# Altium PCB zxuno.PcbDoc
Units mil, origin at the board's own origin, x right, y up, seen from the top; angles counter-clockwise.
Board outline 3395.53 x 2214.53 mil, 2 copper layers (Top Layer, Bottom Layer); 91 components, 132 nets, 465 pads, 113 vias.
Unrouted connection lines stored in the file: 2.
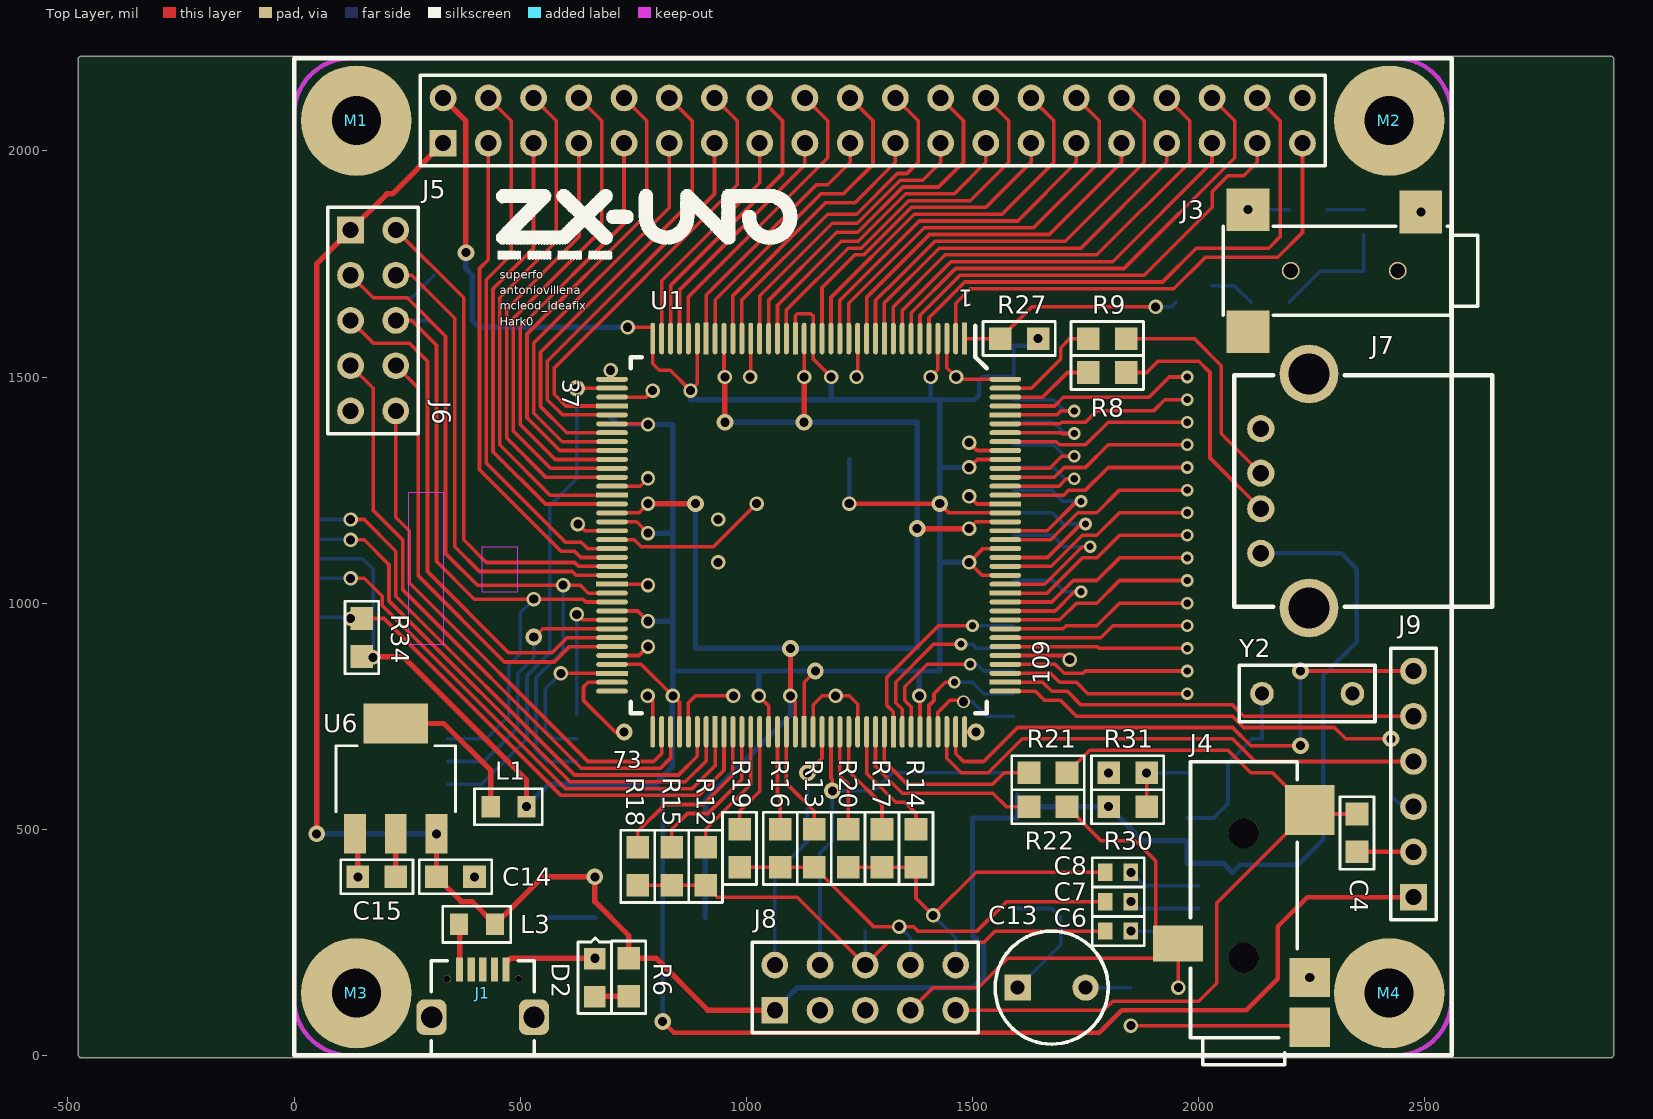
[diagram p0: Top Layer view]
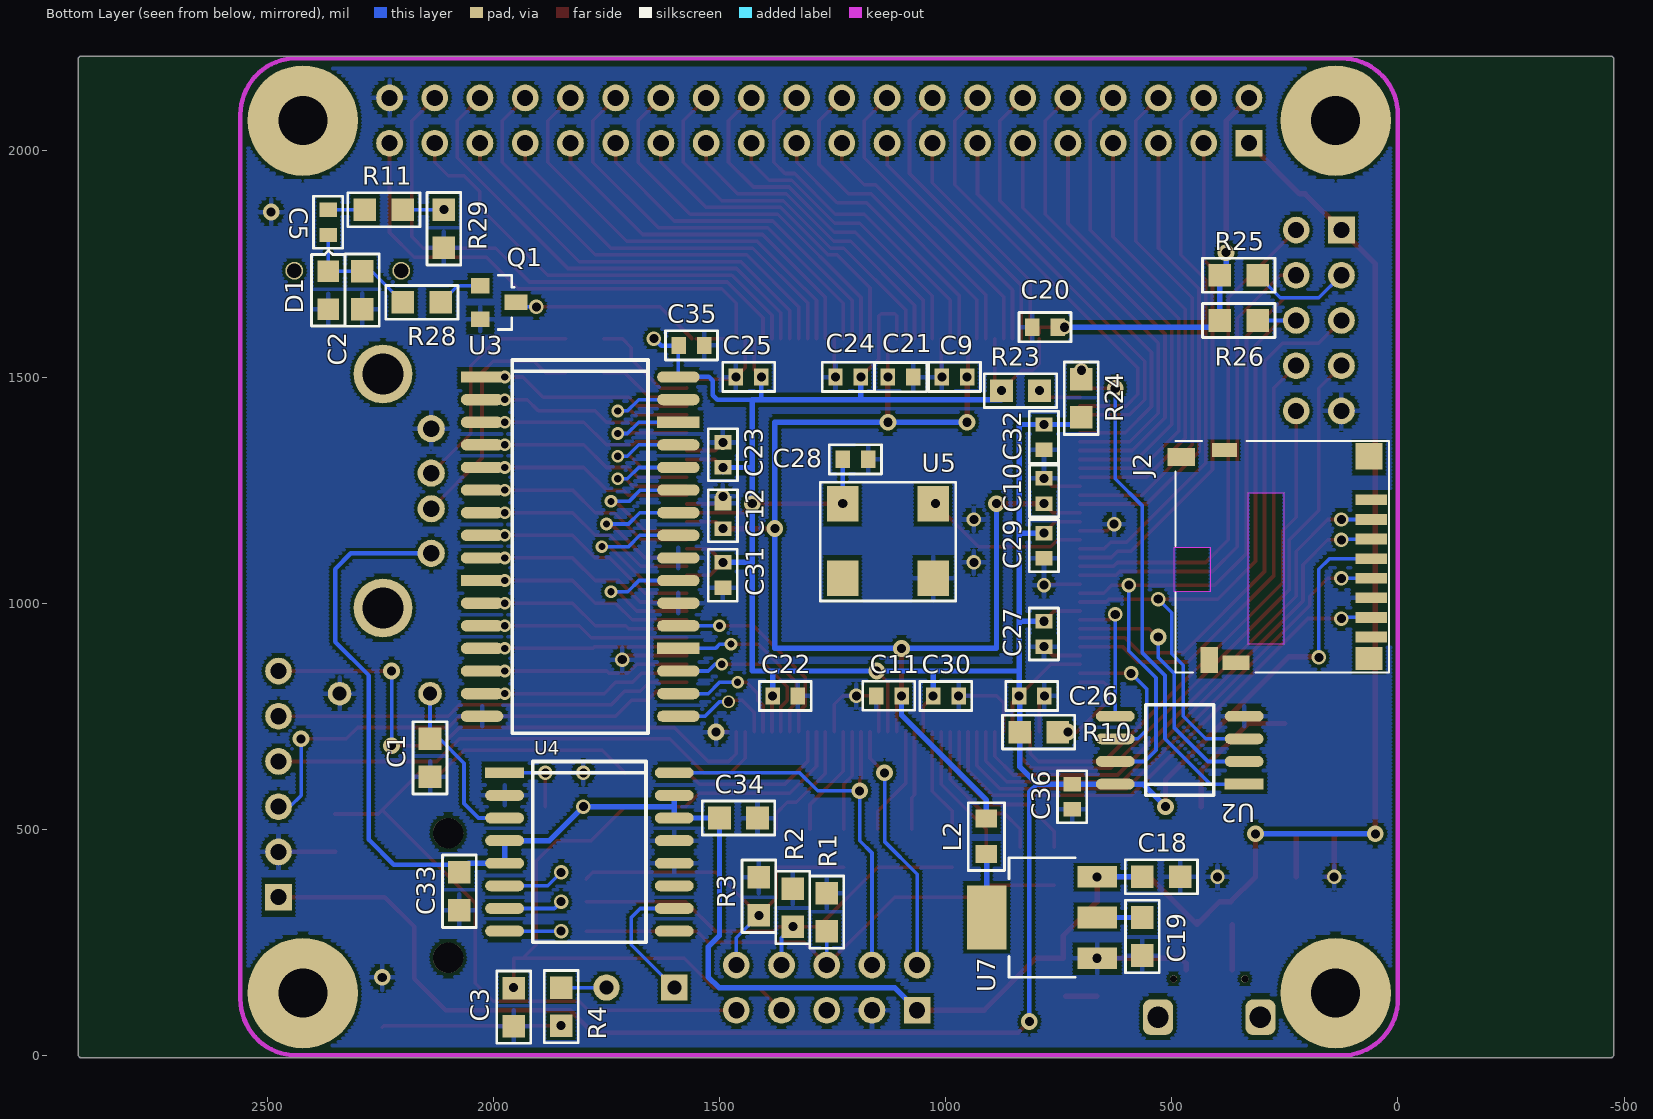
[diagram p1: Bottom Layer view, seen from below]

## Layer stack, top to bottom
Top Solder: solder mask 0.4, Solder Resist, Dk 3.5
Top Layer: signal copper 1.4
Dielectric1: core 12.6, FR-4, Dk 4.8
Bottom Layer: signal copper 1.4
Bottom Solder: solder mask 0.4, Solder Resist, Dk 3.5

## Board outline
-477.44,0 -472.44,-5 2913.09,-5 2918.09,0 2918.09,2204.53 2913.09,2209.53 -472.44,2209.53 -477.44,2204.53

## Design rules (kind name [scope] priority, off if disabled: settings)
Clearance [All] p1: gap=7
HoleSize [All] p1: absolutevalues=TRUE maxlimit=200 minlimit=1 maxpercent=80.000 minpercent=20.000
MinimumSolderMaskSliver [All] p1: minsoldermaskwidth=8
PlaneConnect [All] p1: planeconnectstyle=Relief reliefexpansion=25 reliefentries=4 reliefconductorwidth=12 reliefairgap=10
PolygonConnect [All] p1: connectstyle=Relief reliefconductorwidth=10 reliefentries=4 polygonreliefangle="90 Angle" airgapwidth=10
RoutingLayers RoutingLayers_1 [All] p1: top layer_v5=TRUE bottom layer_v5=TRUE
RoutingLayers [All] p2: top layer_v5=TRUE bottom layer_v5=TRUE
RoutingVias [All] p1: holewidth=20 width=37 viastyle="Through Hole" minholewidth=16 minwidth=28 maxholewidth=28 maxwidth=50
SilkToSilkClearance [All] p1: silktosilkclearance=5
SilkToSolderMaskClearance SilkscreenOverComponentPads [IsPad] p1: minsilkscreentomaskgap=5 clearancetoexposedcopper=TRUE
SolderMaskExpansion [All] p1: expansion=0
UnpouredPolygon [All] p1: allowunpoured=FALSE
Width Net_Width_1 [InNet('1.2V') Or InNet('2.5V') Or InNet('3.3V') Or InNet('5V')] p1: maxlimit=12 minlimit=8 preferedwidth=10
Width [All] p2: maxlimit=12 minlimit=8 preferedwidth=10
23 further rules are at their usual default settings.

## Components (designator, comment, footprint, x,y, rotation, side; value= is the part's Value field where it differs from the comment)
C1 "10pF" SM/C_0805#1 2140,700 r270 bottom
C2 "10nF" SM/C_0805#2 2290,1650 r270 bottom
C3 "10nF" SM/C_0805#2 1955,65 r270 bottom
C4 "10nF" SM/C_0805#2 2350,450 r270 top
C5 "100nF" SM/C_0603 2365,1870 r270 bottom
C6 "100nF" SM/C_0603 1794,275 r0 top
C7 "100nF" SM/C_0603 1794,340 r0 top
C8 "100nF" SM/C_0603 1794,405 r0 top
C9 "100nF" SM/C_0603 952.56,1500 r0 bottom
C10 "100nF" SM/C_0603 782.56,1220 r90 bottom
C11 "100nF" SM/C_0603 1097.56,795 r0 bottom
C12 "100nF" SM/C_0603 1492.56,1165 r90 bottom
C13 "220uF" CYL/D.250/LS.150/.031 1600,150 r0 top
C14 "4.7uF" SM/C_0805#1 315,395 r0 top
C15 "4.7uF" SM/C_0805#1 225,395 r180 top
C18 "4.7uF" SM/C_0805#2 565,395 r0 bottom
C19 "4.7uF" SM/C_0805#2 565,305 r90 bottom
C20 "100nF" SM/C_0603 752.56,1610 r0 bottom
C21 "100nF" SM/C_0603 1127.56,1500 r180 bottom
C22 "100nF" SM/C_0603 1382.56,795 r180 bottom
C23 "100nF" SM/C_0603 1492.56,1300 r90 bottom
C24 "100nF" SM/C_0603 1187.56,1500 r0 bottom
C25 "100nF" SM/C_0603 1407.56,1500 r0 bottom
C26 "100nF" SM/C_0603 837.56,795 r180 bottom
C27 "100nF" SM/C_0603 782.56,960 r270 bottom
C28 "100nF" SM/C_0603 1227.56,1318 r180 bottom
C29 "100nF" SM/C_0603 782.56,1155 r270 bottom
C30 "100nF" SM/C_0603 1027.56,795 r180 bottom
C31 "100nF" SM/C_0603 1492.56,1090 r270 bottom
C32 "100nF" SM/C_0603 782.56,1395 r270 bottom
C33 "10uF" SM/C_0805#1 2075,405 r270 bottom
C34 "10uF" SM/C_0805#1 1500,525 r180 bottom
C35 "100nF" SM/C_0603 1590,1570 r180 bottom
C36 "100nF" SM/C_0603 720,600 r270 bottom
D1 "1N4148" SM/D_0805_21 2365,1650 r270 bottom
D2 "LED" SM/D_0805_21 665,130 r270 top
J1 "microUSB" "MICRO USB" 417.32,190 r0 top
J2 "MicroSD" "SD HR1941CT-ND" 59.06,1102.36 r90 bottom
J3 "Phonejack2 TN" "AUDIO  JACK MJ-2523-SMT" 2440,1735 r180 top
J4 "Phonejack4" "AUDIO  JACK SJ-43514-SMT" 2100,216 r90 top locked
J5 "Header 20X2" HDR2X20 329.53,2016.93 r0 top locked (schematic designator P1)
J6 "Header 5X2" HDR2X5 125,1825 r270 top
J7 "USB" "USB A" 2244.09,1248.03 r90 top locked
J8 "Header 5X2" HDR2X5 1062.86,100 r0 top locked
J9 "Header 6" HDR1X6 2475,350 r90 top
L1 "Inductor" SM/L_0805 435,550 r0 top
L2 "Inductor" SM/L_0805 910,445 r90 bottom
L3 "Inductor" SM/L_0805 365,290 r0 top
M1 "M2.5" M2.5#1 -722.44,2050 r0 top
M2 "M2.5" M2.5#2 3177.56,2070 r0 top
M3 "M2.5" M2.5#3 -792.44,-110 r0 top
M4 "M2.5" M2.5#4 3092.56,-175 r0 top
Q1 "BC846" SM/SOT23_231 1950,1665 r90 bottom
R1 "75" SM/R_0805#1 1262.86,275 r270 bottom
R2 "75" SM/R_0805#1 1337.86,285 r270 bottom
R3 "75" SM/R_0805#2 1412.86,310 r90 bottom
R4 "75" SM/R_0805#1 1850,150 r90 bottom
R6 "300" SM/R_0805#2 740,215 r270 top
R8 "270" SM/R_0805#2 1840,1510 r180 top
R9 "270" SM/R_0805#2 1840,1585 r180 top
R10 "300" SM/R_0805#2 752.56,715 r0 bottom
R11 "470" SM/R_0805#1 2200,1870 r180 bottom
R12 "470" SM/R_0805#2 910,460 r270 top
R13 "470" SM/R_0805#2 1150,500 r270 top
R14 "470" SM/R_0805#2 1375,500 r270 top
R15 "1K" SM/R_0805#2 835,460 r270 top
R16 "1K" SM/R_0805#2 1075,500 r270 top
R17 "1K" SM/R_0805#2 1300,500 r270 top
R18 "2K" SM/R_0805#2 760,460 r270 top
R19 "2K" SM/R_0805#2 985,500 r270 top
R20 "2K" SM/R_0805#2 1225,500 r270 top
R21 "3K9" SM/R_0805#2 1625,625 r0 top
R22 "3K9" SM/R_0805#2 1625,550 r0 top
R23 "4K7" SM/R_0805#2 792.56,1470 r0 bottom
R24 "4K7" SM/R_0805#2 700,1495 r270 bottom
R25 "2K" SM/R_0805#2 310,1725 r0 bottom
R26 "2K" SM/R_0805#2 310,1625 r0 bottom
R27 "10K" SM/R_0805#2 1645,1585 r180 top
R28 "10K" SM/R_0805#1 2200,1665 r0 bottom
R29 "10K" SM/R_0805#1 2109.28,1869.85 r90 bottom
R30 "0" SM/R_0805#2 1885,550 r180 top (schematic designator R32)
R31 "0" SM/R_0805#2 1885,625 r180 top (schematic designator R33)
R34 "10K" SM/R_0805#2 150,966 r270 top
U1 "XC6SLX9/TFP144_1" QUAD.50M/144/WG22.60 1482.56,1585 r180 top locked
U2 "W25X40BV/W25Q80BV" SOJ.050/8/WB.300/L.200 340,600 r270 bottom
U3 "CY62148EV30" SOG.050/32/WG.480/L.825 2025,1500 r270 bottom locked
U4 "AD724" SOJ.050/16/WB.400/L.400 1975,625 r270 bottom
U5 "50MHz" SM/OSC 1227.56,1055 r0 bottom
U6 "ZLDO1117G33TA" SM/SOT223 135,490 r0 top
U7 "ZLDO1117G12TA" SM/SOT223 665,215 r90 bottom
Y2 "4.43M" RAD/.300X.125/LS.200/.031 2140,800 r0 top

## Footprints (in the part's own frame and the unit in brackets; to place one, negate y for a bottom-side part, rotate by r counter-clockwise, add the part's x,y. Pads: shape width x height; smd on the part's side, far side on the other; paste and mask are expansions set on the pad)
"AUDIO  JACK MJ-2523-SMT" [mil]
  rect 94.47x94.47 smd: 1(-51.18,-129.72) 2(330.72,-134.85) 3(330.72,134.85)
  round 39.37 hole 31.5 unplated: 4(0,0) 5(236.2,0)
  silkscreen extent -177,-98 385,98
"AUDIO  JACK SJ-43514-SMT" [mm]
  rect 2.2x2.286 smd: 1(-3.9,-3.7) 4(-1.1,-3.7)
  rect 2.8x2.8 smd: 2(8.3,-3.7)
  rect 2x2.8 smd: 3(0.8,3.7)
  round 1.7 hole 1.7 unplated: M(0,0) M(7,0)
  silkscreen extent -6,-3 11,3
CYL/D.250/LS.150/.031 [mil]
  rect 58x58 / inner round 60 / far side rect 58x58 hole 31: 1(0,0)
  round 58 / inner round 60 / far side round 58 hole 31: 2(150,0)
  silkscreen extent -50,-125 200,125
HDR1X6 [mm] "Connector; Header; 6 Position"
  rect 1.5x1.5 hole 0.9: 1(0,0)
  round 1.5 hole 0.9: 2(2.54,0) 3(5.08,0) 4(7.62,0) 5(10.16,0) 6(12.7,0)
  silkscreen extent -1.27,-1.27 13.97,1.27
HDR2X5 [mm] "Connector; Header; 5x2 Position"
  rect 1.5x1.5 hole 0.9: 1(0,0)
  round 1.5 hole 0.9: 2(0,2.54) 3(2.54,0) 4(2.54,2.54) 5(5.08,0) 6(5.08,2.54) 7(7.62,0) 8(7.62,2.54) 9(10.16,0) 10(10.16,2.54)
  silkscreen extent -1.27,-1.27 11.43,3.81
HDR2X20 [mm] "Connector; Header; 20x2 Position"
  rect 1.5x1.5 hole 0.9: 1(0,0)
  round 1.5 hole 0.9: 2(0,2.54) 3(2.54,0) 4(2.54,2.54) 5(5.08,0) 6(5.08,2.54) 7(7.62,0) 8(7.62,2.54) 9(10.16,0) 10(10.16,2.54) 11(12.7,0) 12(12.7,2.54) 13(15.24,0) 14(15.24,2.54) 15(17.78,0) 16(17.78,2.54) 17(20.32,0) 18(20.32,2.54) 19(22.86,0) 20(22.86,2.54) 21(25.4,0) 22(25.4,2.54) 23(27.94,0) 24(27.94,2.54) 25(30.48,0) 26(30.48,2.54) 27(33.02,0) 28(33.02,2.54) 29(35.56,0) 30(35.56,2.54) 31(38.1,0) 32(38.1,2.54) 33(40.64,0) 34(40.64,2.54) 35(43.18,0) 36(43.18,2.54) 37(45.72,0) 38(45.72,2.54) 39(48.26,0) 40(48.26,2.54)
  silkscreen extent -1.27,-1.27 49.53,3.81
M2.5#1 [mm]
  round 6.2 hole 2.75: ""(21.85,0.43)
M2.5#2 [mm]
  round 6.2 hole 2.75: ""(-19.21,-0.078)
M2.5#3 [mm]
  round 6.2 hole 2.75: ""(23.628,6.294)
M2.5#4 [mm]
  round 6.2 hole 2.75: ""(-17.051,7.945)
"MICRO USB" [mm]
  rect 0.4x1.35 smd: 1(-1.3,0) 2(-0.65,0) 3(0,0) 4(0.65,0) 5(1.3,0)
  round 0.4 hole 0.4 unplated: 11(2,-0.525) M(-2,-0.525)
  rrect50% 1.7x2 hole 1.2: M(-2.875,-2.675) M(2.875,-2.675)
  silkscreen extent -2.9,-4.8 2.9,0.5
QUAD.50M/144/WG22.60 [mil]
  rect 11x70 smd: 1(0,0) 10(177.3,0) 20(374.3,0) 30(571.3,0) 80(551.6,869.5) 90(354.6,869.5) 100(157.6,869.5)
  oval 11x70 smd: 2(19.7,0) 3(39.4,0) 4(59.1,0) 5(78.8,0) 6(98.5,0) 7(118.2,0) 8(137.9,0) 9(157.6,0) 11(197,0) 12(216.7,0) 13(236.4,0) 14(256.1,0) 15(275.8,0) 16(295.5,0) 17(315.2,0) 18(334.9,0) 19(354.6,0) 21(394,0) 22(413.7,0) 23(433.4,0) 24(453.1,0) 25(472.8,0) 26(492.5,0) 27(512.2,0) 28(531.9,0) 29(551.6,0) 31(591,0) 32(610.7,0) 33(630.4,0) 34(650.1,0) 35(669.8,0) 36(689.5,0) 73(689.5,869.5) 74(669.8,869.5) 75(650.1,869.5) 76(630.4,869.5) 77(610.7,869.5) 78(591,869.5) 79(571.3,869.5) 81(531.9,869.5) 82(512.2,869.5) 83(492.5,869.5) 84(472.8,869.5) 85(453.1,869.5) 86(433.4,869.5) 87(413.7,869.5) 88(394,869.5) 89(374.3,869.5) 91(334.9,869.5) 92(315.2,869.5) 93(295.5,869.5) 94(275.8,869.5) 95(256.1,869.5) 96(236.4,869.5) 97(216.7,869.5) 98(197,869.5) 99(177.3,869.5) 101(137.9,869.5) 102(118.2,869.5) 103(98.5,869.5) 104(78.8,869.5) 105(59.1,869.5) 106(39.4,869.5) 107(19.7,869.5) 108(0,869.5)
  oval 70x11 smd: 37(779.5,90) 38(779.5,109.7) 39(779.5,129.4) 41(779.5,168.8) 42(779.5,188.5) 43(779.5,208.2) 44(779.5,227.9) 45(779.5,247.6) 46(779.5,267.3) 47(779.5,287) 48(779.5,306.7) 49(779.5,326.4) 51(779.5,365.8) 52(779.5,385.5) 53(779.5,405.2) 54(779.5,424.9) 55(779.5,444.6) 56(779.5,464.3) 57(779.5,484) 58(779.5,503.7) 59(779.5,523.4) 61(779.5,562.8) 62(779.5,582.5) 63(779.5,602.2) 64(779.5,621.9) 65(779.5,641.6) 66(779.5,661.3) 67(779.5,681) 68(779.5,700.7) 69(779.5,720.4) 71(779.5,759.8) 72(779.5,779.5) 109(-90,779.5) 111(-90,740.1) 112(-90,720.4) 113(-90,700.7) 114(-90,681) 115(-90,661.3) 116(-90,641.6) 117(-90,621.9) 118(-90,602.2) 119(-90,582.5) 121(-90,543.1) 122(-90,523.4) 123(-90,503.7) 124(-90,484) 125(-90,464.3) 126(-90,444.6) 127(-90,424.9) 128(-90,405.2) 129(-90,385.5) 131(-90,346.1) 132(-90,326.4) 133(-90,306.7) 134(-90,287) 135(-90,267.3) 136(-90,247.6) 137(-90,227.9) 138(-90,208.2) 139(-90,188.5) 141(-90,149.1) 142(-90,129.4) 143(-90,109.7) 144(-90,90)
  rect 70x11 smd: 40(779.5,149.1) 50(779.5,346.1) 60(779.5,543.1) 70(779.5,740.1) 110(-90,759.8) 120(-90,562.8) 130(-90,365.8) 140(-90,168.8)
  silkscreen extent -49,-28 738,829
RAD/.300X.125/LS.200/.031 [mil]
  round 52 hole 31: 1(0,0) 2(200,0)
  silkscreen extent -50,-62 250,62
"SD HR1941CT-ND" [mm] "Connector; Header; 8 Position"
  rect 0.6x1.75 smd: 1(3.2,0) 2(2.1,0) 3(1,0) 4(-0.1,0) 5(-1.2,0) 6(-2.3,0) 7(-3.4,0) 8(-4.5,0)
  rect 1x1.55 smd: 9(5.6,10.675)
  rect 1.45x1 smd: 10(-5.8,9.1)
  rect 1.3x1.5 smd: P1(-5.7,0.125)
  rect 1.5x1.5 smd: P2(5.65,0.125)
  rect 0.8x1.5 smd: P3(-5.95,7.6)
  rect 0.8x1.4 smd: P4(6,8.25)
  Keep-Out Layer pour cut-out: -4.9,6.9 3.6,6.9 3.6,4.9 -4.9,4.9
  Keep-Out Layer pour cut-out: -1.95,11.05 0.55,11.05 0.55,9.05 -1.95,9.05
  silkscreen extent -6.5,-1 6.5,11
SM/C_0603 [mil]
  rect 32x38 smd: 1(0,0) 2(56,0)
  silkscreen extent -30,-33 86,32
SM/C_0805#1 [mil]
  rect 50x50 smd: 1(0,0) 2(84,0)
  silkscreen extent -38,-38 122,38
SM/C_0805#2 [mil]
  rect 50x50 smd: 1(0,0) 2(-84,0)
  silkscreen extent -122,-38 38,38
SM/D_0805_21 [mil]
  rect 48x48 smd: 1(0,0) 2(-84,0)
  silkscreen extent -130,-37 37,37
SM/L_0805 [mil]
  rect 40x48 smd: 1(0,0) 2(79,0)
  silkscreen extent -36,-40 114,40
SM/OSC [mil]
  rect 70x78 smd: 1(0,0) 2(-200,0) 3(-200,-165) 4(0,-165)
  silkscreen extent -250,-212 50,50
SM/R_0805#1 [mil]
  rect 50x50 smd: 1(0,0) 2(-84,0)
  silkscreen extent -122,-38 38,38
SM/R_0805#2 [mil]
  rect 50x50 smd: 1(0,0) 2(84,0)
  silkscreen extent -38,-38 122,38
SM/SOT23_231 [mil]
  rect 34x50 smd: 1(0,0)
  rect 34x40 smd: 2(37,79) 3(-37,79)
  silkscreen extent -60,3 60,39
SM/SOT223 [mil]
  rect 48x88 smd: 1(0,0) 2(90,0) 3(180,0)
  rect 142x88 smd: 4(90,244)
  silkscreen extent -42,49 222,195
SOG.050/32/WG.480/L.825 [mil]
  rect 25x94 smd: 1(0,0) 10(450,0) 20(600,434) 30(100,434)
  oval 25x94 smd: 2(50,0) 3(100,0) 4(150,0) 5(200,0) 6(250,0) 7(300,0) 8(350,0) 9(400,0) 11(500,0) 12(550,0) 13(600,0) 14(650,0) 15(700,0) 16(750,0) 17(750,434) 18(700,434) 19(650,434) 21(550,434) 22(500,434) 23(450,434) 24(400,434) 25(350,434) 26(300,434) 27(250,434) 28(200,434) 29(150,434) 31(50,434) 32(0,434)
  silkscreen extent -37,67 788,367
SOJ.050/8/WB.300/L.200 [mil]
  rect 24x86 smd: 1(0,0)
  oval 24x86 smd: 2(-50,0) 3(-100,0) 4(-150,0) 5(-150,-285) 6(-100,-285) 7(-50,-285) 8(0,-285)
  silkscreen extent -175,-218 25,-67
SOJ.050/16/WB.400/L.400 [mil]
  rect 24x86 smd: 1(0,0)
  oval 24x86 smd: 2(50,0) 3(100,0) 4(150,0) 5(200,0) 6(250,0) 7(300,0) 8(350,0) 9(350,375) 10(300,375) 11(250,375) 12(200,375) 13(150,375) 14(100,375) 15(50,375) 16(0,375)
  silkscreen extent -25,62 375,312
"USB A" [mm]
  round 1.524 hole 0.92: 1(-3.5,2.71) 2(-1,2.71) 3(1,2.71) 4(3.5,2.71)
  round 3.3 hole 2.3: 5(-6.57,0) 6(6.57,0)
  silkscreen extent -6.5,-10.3 6.5,4.2

## Part data
C1 C2 C3 C4 C5 C6 C7 C8: library part "CAP NP_Dup1"
C9 C10 C11 C12 C14 C15 C18 C19 C20 C21 C22 C23 C24 C25 C26 C27 C28 C29 C30 C31 C32 C33 C34 C35 C36: library part "CAP NP"
C13: library part CAP
D1: library part DIODE
J1: library part CON2_0
J2: library part "Header 8", "Header, 8-Pin"
J3: "Jack Socket, 3.5mm, Thru-Hole, Vertical, 2-Conductor with Tip closed"
J4: "Jack Socket, 3.5mm, Thru-Hole, Right Angle, 4-Conductor"
J5: "Header, 20-Pin, Dual row"
J6 J8: "Header, 5-Pin, Dual row"
J7: library part "Header 4", "Header, 4-Pin"
J9: "Header, 6-Pin"
Q1: library part BC547
R1 R2 R3 R4 R6 R8 R9 R10 R11 R12 R13 R14 R15 R16 R17 R18 R19 R20 R21 R22 R23 R24 R25 R26 R27 R28 R29 R30 R31 R34: library part R
U2: library part AT45DB011/SOIC_3
U3: library part CY62128/SOIC_3
U5: library part CS-403/TO_0
U6 U7: library part REGULATOR-1_0
Y2: library part CRYSTAL

## Via types
v1: diameter 32, hole 20, Top Layer to Bottom Layer, 59 vias
v2: diameter 28, hole 16, Top Layer to Bottom Layer, 27 vias
v3: diameter 37, hole 20, Top Layer to Bottom Layer, 26 vias
v4: diameter 28, hole 20, Top Layer to Bottom Layer, 1 vias

## Nets (pads, with @x,y where several pads share a name; then routed paths per layer and width w, separated by ;. In a path a pad name is that pad's centre, name@x,y a point inside that pad or via, vN(x,y) a via of type N, cw(c..) or ccw(c..) an arc to the next point about the centre after c; other vN are vias at no path point)
1.2V: C9.1 C10.1 C11.1 C12.1 C21.1 L2.2 U1.19 U1.28 U1.52 U1.89 U1.128 | length 3034.4
  Top Layer w8: U1.52 762.06,1199.5 v1(782.56,1220) ; v1@950.66,1501.9 U1.28 ; v1(1097.56,795) 1108.26,784.3 U1.89 ; v1@1127.96,1500.4 U1.19 ; v1(1492.56,1165) 1507.36,1179.8 U1.128
  Top Layer w12: v1(782.56,1220) v3(887.56,1220) ; v3(952.56,1400) v1(952.56,1500) ; v1(1097.56,795) v3(1097.56,900) ; v3(1127.56,1400) v1(1127.56,1500) ; v3(1377.56,1165) v1(1492.56,1165)
  Bottom Layer w12: v3(887.56,1220) 887.56,900 v3(1097.56,900) 1377.56,900 v3(1377.56,1165) 1377.56,1400 v3(1127.56,1400) v3(952.56,1400) ; L2.2 910,564.88 1097.56,752.44 v1(1097.56,795)
3.3V: C20.1 C22.1 C23.1 C24.1 C25.1 C26.1 C27.1 C28.1 C29.1 C30.1 C31.1 C32.1 C35.1 C36.1 J2.4 J5.2 J9.1 L1.2 R10.2 R23.2 R24.2 R25.2 R26.2 R27.1 R34.2 U1.4 U1.18 U1.20 U1.31 U1.36 U1.42 U1.53 U1.63 U1.69 U1.76 U1.86 U1.90 U1.103 U1.122 U1.125 U1.129 U1.135 U2.8 U3.32 U5.4 | length 10137.4
  Top Layer w8: U1.69 767.96,864.6 v1(837.56,795) 852.16,780.4 U1.76 ; U1.63 759.76,982.8 v1(782.56,960) ; U1.53 757.76,1179.8 v1(782.56,1155) ; U1.42 v1@781.06,1396.5 ; v1(737.56,1610) 790,1610 793.06,1606.94 U1.36@793.06,1596.94 ; U1.36 793.06,1529.5 807.56,1515 831.56,1515 v1(876.56,1470) 891.56,1485 U1.31 ; v1(1027.56,795) 1049.16,773.4 U1.86 ; U1.20 1108.26,1635.7 1112.56,1640 1142.56,1640 1147.66,1634.9 U1.18 1147.66,1539.9 v1(1187.56,1500) ; U1.90 1127.96,825.4 v3(1152.56,850) ; v1(1382.56,795) 1384.06,793.5 U1.103 ; v1(1407.56,1500) 1423.46,1515.9 U1.4 ; v3(1427.56,1220) 1448.06,1199.5 U1.129 ; v1(1492.56,1300) 1510.26,1317.7 U1.135 ; U1.122 1520.96,1061.6 v1(1492.56,1090) 1523.26,1120.7 U1.125
  Top Layer w10: v3(815,75) 840,50 1780,50 1830,100 2105,100 2175,170 2175,285 2240,350 J9.1 ; v1(1227.56,1220) v3(1427.56,1220)
  Top Layer w12: v1@175,882 241,882 514,609 v3(514,550) ; J5.2 380,2066.46 v3(380,1775)
  Bottom Layer w8: J2.4 151.57,1098.43 175,1075 v1(175,880) ; U3.32@1590,1501 U3.32 C35.1@1591,1569
  Bottom Layer w10: 798,600 815,583 v3(815,75) ; v1(1227.56,1220) C28.1 ; 1407.56,1450 v1(1407.56,1500) ; 1427.56,1450 1505,1450 1515,1460 1515,1492 1524,1501 U3.32@1590,1501 ; C35.1@1591,1569 1629,1569 v1(1645,1585)
  Bottom Layer w12: v3(380,1775) 380,1739 R25.2 R26.2 409,1610 v1(737.56,1610) C20.1 ; v3(514,550) 564,600 U2.8 C36.1 798,600 836.56,638.56 R10.2 C26.1@836.56,794 ; R24.2 716,1395 v1(782.56,1395) 837.56,1395 837.56,1155 ; v1(782.56,960) 837.56,960 ; v1(782.56,1155) 837.56,1155 ; v1(837.56,795) 837.56,850 ; R23.2@877.56,1450 1407.56,1450 1427.56,1450 1427.56,1300 ; v1(1027.56,795) 1027.56,850 ; 1187.56,1451 v1(1187.56,1500) ; v1(1382.56,795) 1382.56,850 ; v1(1492.56,1090) 1427.56,1090 ; C23.1@1497.56,1300 1497.56,1295 1492.56,1290 1482.56,1300 1427.56,1300 ; 837.56,850 837.56,960 ; 837.56,850 1027.56,850 ; 837.56,960 837.56,1155 ; 1027.56,850 v3(1152.56,850) 1382.56,850 ; 1382.56,850 1427.56,850 1427.56,1090 ; 1427.56,1090 v3(1427.56,1220) 1427.56,1300
5V: C14.1 C18.1 C33.1 C34.1 J5.1 J6.1 J7.1 J8.1 L3.2 R6.1 R30.2 U4.4 U4.5 U4.14 U4.15 U6.3 U7.3 | length 5788.9
  Top Layer w12: v3(50,490) 50,1750 J6.1 205,1905 217.6,1905 J5.1 ; v3(315,490) C14.1 370,340 394,340 L3.2 ; L3.2@444,296 L3.2 ; J8.1 915,100 800,215 R6.1 740,265 665,340 v3(665,395) 549,395 L3.2
  Bottom Layer w10: C33.1 2092,422 2220,422 2275,477 2275,840 2350,915 2350,1075 2315,1110 J7.1@2137.64,1110
  Bottom Layer w12: v3(50,490) v3(315,490) ; C18.1 v3(665,395) ; J8.1 1112.86,150 1501,150 1525,174 1525,240 1500,265 C34.1 U4.14 1600,550 ; U4.15 1600,550 ; C33.1 2055,425 U4.5 U4.4 1876,475 v1(1801,550) 1600,550
B: C6.1 J8.6 R1.1 R12.2 R15.2 R18.2 | length 1213
  Top Layer w8: R18.2 R15.2 R12.2 936,350 1112.86,350 J8.6 1312.86,250 1525,250 1550,275 C6.1
  Bottom Layer w8: J8.6 R1.1
B0: R18.1 U1.82 | length 392.4
  Top Layer w8: R18.1 760,495 820,555 905,555 970.36,620.36 U1.82
B1: R15.1 U1.83 | length 346.1
  Top Layer w8: R15.1 835,500 870,535 915,535 990.06,610.06 U1.83
B2: R12.1 U1.84 | length 296.8
  Top Layer w8: R12.1 910,500 1009.76,599.76 U1.84
CLK: U1.55 U5.3 | length 365.2
  Top Layer w8: U1.55 752.16,1140.4 767.56,1125 927.56,1125 v1(1022.56,1220)
CSYNC: J8.4 U1.93 U4.16 | length 959.5
  Top Layer w8: U1.93 1187.06,612.94 1190,610 v3(1190,585) v3@1190,580
  Bottom Layer w8: J8.4 1162.86,447.86 1190,475 v3(1190,585) 1283,585 1323,625 U4.16
EAR: Q1.1 R27.2 U1.1 | length 490.6
  Top Layer w8: U1.1 R27.2@1551,1585 ; R27.2 1631,1655 v1(1905,1655)
  Bottom Layer w8: v1(1905,1655) 1940,1655 Q1.1
EXT1: J5.3 U1.57 | length 1103.4
  Top Layer w8: J5.3 429.53,1759.53 410,1740 410,1295 590,1115 620,1115 634,1101 U1.57
EXT2: J5.4 U1.56 | length 1207.1
  Top Layer w8: J5.4 480,2066.46 480,1770 425,1715 425,1310 600,1135 635,1135 649.3,1120.7 U1.56
EXT3: J5.5 U1.51 | length 1030
  Top Layer w8: J5.5 529.53,1784.53 440,1695 440,1335 555.8,1219.2 U1.51
EXT4: J5.6 U1.50 | length 1133.7
  Top Layer w8: J5.6 580,2066.46 580,1800 455,1675 455,1350 566.1,1238.9 U1.50
EXT5: J5.7 U1.48 | length 986.5
  Top Layer w8: J5.7@630,2016.46 630,1810 470,1650 470,1365 557,1278 U1.48@702.76,1278
EXT6: J5.8 U1.47 | length 1090.6
  Top Layer w8: J5.8 680,2066.46 680,1825 485,1630 485,1380 567,1298 U1.47
EXT7: J5.9 U1.46 | length 952.1
  Top Layer w8: U1.46 577.3,1317.7 500,1395 500,1610 729.53,1839.53 J5.9
EXT8: J5.10 U1.45 | length 1055.7
  Top Layer w8: U1.45 587.6,1337.4 515,1410 515,1595 780,1860 780,2066.46 J5.10
EXT9: J5.11 U1.44 | length 920.1
  Top Layer w8: U1.44 592.9,1357.1 530,1420 530,1575 829.53,1874.53 J5.11
EXT10: J5.12 U1.43 | length 1023.8
  Top Layer w8: U1.43 603.2,1376.8 545,1435 545,1555 880,1890 880,2066.46 J5.12
EXT11: J5.13 U1.41 | length 877.1
  Top Layer w8: U1.41 593.8,1416.2 560,1450 560,1535 929.53,1904.53 J5.13
EXT12: J5.14 U1.40 | length 982.6
  Top Layer w8: U1.40 600.9,1435.9 575,1461.8 575,1520 980,1925 980,2066.46 J5.14
EXT13: J5.15 U1.35 | length 521.7
  Top Layer w8: U1.35 812.76,1712.76 1029.53,1929.53 J5.15
EXT14: J5.16 U1.34 | length 655.4
  Top Layer w8: U1.34 832.46,1702.46 1080,1950 1080,2066.46 J5.16
EXT15: J5.17 U1.33 | length 546.8
  Top Layer w8: U1.33 852.16,1692.16 1129.53,1969.53 J5.17
EXT16: J5.18 U1.32 | length 680.5
  Top Layer w8: U1.32 871.86,1676.86 1180,1985 1180,2066.46 J5.18
EXT17: J5.19 U1.30 | length 578.4
  Top Layer w8: U1.30 911.26,1681.26 1155,1925 1180,1925 1229.53,1974.53 J5.19
EXT18: J5.20 U1.29 | length 726.7
  Top Layer w8: U1.29 930.96,1670.96 1165,1905 1215,1905 1280,1970 1280,2066.46 J5.20
EXT19: J5.21 U1.27 | length 618.8
  Top Layer w8: U1.27 970.36,1680.36 1175,1885 1240,1885 1329.53,1974.53 J5.21
EXT20: J5.22 U1.26 | length 764.1
  Top Layer w8: U1.26 990.06,1670.06 1180,1860 1243.93,1860 1333.93,1950 1355,1950 1380,1975 1380,2066.46 J5.22
EXT21: J5.23 U1.24 | length 659.2
  Top Layer w8: U1.24 1029.46,1679.46 1190,1840 1245.15,1840 1340.15,1935 1390,1935 1429.53,1974.53 J5.23
EXT22: J5.24 U1.23 | length 804.5
  Top Layer w8: U1.23 1049.16,1669.16 1200,1820 1246.36,1820 1346.36,1920 1425,1920 1480,1975 1480,2066.46 J5.24
EXT23: J5.25 U1.22 | length 707.7
  Top Layer w8: U1.22 1068.86,1658.86 1210,1800 1247.57,1800 1352.57,1905 1460,1905 1529.53,1974.53 J5.25
EXT24: J5.26 U1.21 | length 853.1
  Top Layer w8: U1.21 1088.56,1648.56 1225,1785 1253.79,1785 1358.79,1890 1495,1890 1580,1975 1580,2066.46 J5.26
EXT25: J5.27 U1.17 | length 731.7
  Top Layer w8: U1.17 1167.36,1697.36 1240,1770 1260,1770 1365,1875 1530,1875 1629.53,1974.53 J5.27
EXT26: J5.28 U1.16 | length 870.5
  Top Layer w8: U1.16 1187.06,1675.85 1371.21,1860 1565,1860 1680,1975 1680,2066.46 J5.28
EXT27: J5.29 U1.15 | length 775.9
  Top Layer w8: U1.15 1206.76,1669.33 1382.43,1845 1600,1845 1729.53,1974.53 J5.29
EXT28: J5.30 U1.14 | length 923.5
  Top Layer w8: U1.14 1226.46,1662.82 1393.64,1830 1635,1830 1780,1975 1780,2066.46 J5.30
EXT29: J5.31 U1.12 | length 820.7
  Top Layer w8: U1.12 1265.86,1676.01 1404.85,1815 1670,1815 1829.53,1974.53 J5.31
EXT30: J5.32 U1.11 | length 968.3
  Top Layer w8: U1.11 1285.56,1669.49 1311.07,1695 1312.13,1695 1417.13,1800 1705,1800 1880,1975 1880,2066.46 J5.32
EXT31: J5.33 U1.10 | length 874.2
  Top Layer w8: U1.10 1305.26,1663.91 1426.35,1785 1740,1785 1929.53,1974.53 J5.33
EXT32: J5.34 U1.9 | length 1020.4
  Top Layer w8: U1.9 1324.96,1654.96 1440,1770 1775,1770 1980,1975 1980,2066.46 J5.34
EXT33: J5.35 U1.8 | length 925
  Top Layer w8: U1.8 1344.66,1647.1 1452.56,1755 1810,1755 2029.53,1974.53 J5.35
EXT34: J5.36 U1.7 | length 1067.4
  Top Layer w8: U1.7 1364.36,1641.8 1462.56,1740 1835,1740 2080,1985 2080,2066.46 J5.36
EXT35: J5.37 U1.6 | length 999.9
  Top Layer w8: U1.6 1384.06,1636.5 1472.56,1725 1880,1725 2030,1875 2030,1910 2065,1945 2100,1945 2129.53,1974.53 J5.37
EXT36: J5.38 U1.5 | length 1224.3
  Top Layer w8: U1.5 1403.76,1631.2 1482.56,1710 1920,1710 1995,1785 2155,1785 2180,1810 2180,2066.46 J5.38
EXT37: J5.39 U1.2 | length 1106.8
  Top Layer w8: U1.2 1462.86,1662.86 1495,1695 1945,1695 2015,1765 2175,1765 2229.53,1819.53 J5.39
EXT38: J6.7 U1.75 | length 1366.1
  Top Layer w8: J6.7 175,1475 175,1205 240,1140 240,1030 635,635 810,635 832.46,657.46 U1.75
EXT39: J6.10 U1.74 | length 1168.9
  Top Layer w8: J6.10 225,1190 255,1160 255,1045 650,650 795,650 812.76,667.76 U1.74
EXT40: J6.8 U1.67 | length 1006.6
  Top Layer w8: J6.8 275,1475 275,1060 465,870 575,870 609,904 U1.67
EXT41: J6.5 U1.66 | length 1168.9
  Top Layer w8: J6.5 175,1575 255,1575 295,1535 295,1070 475,890 570,890 603.7,923.7 U1.66
EXT42: J6.4 U1.59 | length 1048.7
  Top Layer w8: J6.4 260,1725 355,1630 355,1125 410,1070 615,1070 623.4,1061.6 U1.59
EXT43: J6.2 U1.58 | length 1099.5
  Top Layer w8: J6.2 375,1675 375,1140 425,1090 620,1090 628.7,1081.3 U1.58
FLASH_CS: U1.38 U2.1 | length 1114.7
  Top Layer w8: v3(625,1475) U1.38@702.76,1475
  Bottom Layer w8: U2.1 415,600 515,700 515,840 565,890 565,1215 625,1275 v3(625,1475)
FLASH_MISO: U1.65 U2.2 | length 581.2
  Top Layer w8: v3(530,925) 531.6,925 550,943.4 U1.65
  Bottom Layer w8: U2.2 420,650 495,725 495,845 530,880 v3(530,925)
FLASH_MOSI: U1.64 U2.5 | length 303
  Top Layer w8: v1(625,975) 636.9,963.1 U1.64
  Bottom Layer w8: U2.5@625,755 v1(625,975)
FLASH_SCK: U1.70 U2.6 | length 330.7
  Top Layer w8: v1(590,844.9) U1.70
  Bottom Layer w8: v1(590,844.9) 555,809.9 555,720 575,700 U2.6
G: C7.1 J8.8 R2.1 R13.2 R16.2 R19.2 | length 989.7
  Top Layer w8: R19.2 R16.2 R13.2 1281,285 v1(1337.86,285) 1368.86,285 1378.86,275 1510,275 1575,340 C7.1
  Bottom Layer w8: v1(1337.86,285) 1362.86,260 J8.8
G0: R19.1 U1.85 | length 233.9
  Top Layer w8: R19.1 985,540 1029.46,584.46 U1.85
G1: R16.1 U1.87 | length 218
  Top Layer w8: U1.87 1068.86,576.14 1075,570 R16.1
G2: R13.1 U1.88 | length 240.9
  Top Layer w8: U1.88 1088.56,601.44 1150,540 R13.1
GND: C1.2 C2.1 C3.1 C4.1 C9.2 C10.2 C11.2 C12.2 C14.2 C15.2 C18.2 C19.2 C20.2 C21.2 C22.2 C23.2 C24.2 C25.2 C26.2 C27.2 C28.2 C29.2 C30.2 C31.2 C32.2 C33.2 C34.2 C35.2 C36.2 D1.1 D2.2 J1.5 J2.6 J3.1 J4.4 J5.40 J6.9 J7.4 J8.3 J9.2 Q1.3 R1.2 R2.2 R3.2 R29.2 R31.2 U1.3 U1.13 U1.25 U1.49 U1.54 U1.60 U1.68 U1.73 U1.77 U1.91 U1.96 U1.108 U1.113 U1.130 U1.136 U1.144 U2.4 U3.16 U3.22 U3.24 U4.2 U4.12 U4.13 U5.2 U6.1 U7.1 Y2.2 | length 2028.1
  Top Layer w8: v1(627.56,1175) 642.46,1160.1 U1.54 ; U1.68 762.86,884.3 v1(782.56,904) ; U1.60 780.66,1041.9 v1(782.56,1040) ; U1.49 765.16,1258.6 v1(782.56,1276) ; v1(781.56,795) 793.06,783.5 U1.73 ; U1.77 871.86,779.3 887.56,795 v1(971.56,795) ; v1(1008.56,1500) 1009.76,1501.2 U1.25 ; U1.91 1147.66,775.1 1167.56,795 1227.56,795 1246.16,776.4 U1.96 ; v1(1243.56,1500) 1246.16,1502.6 U1.13 ; U1.3 1443.16,1520.4 v1(1463.56,1500) 1468.56,1495 U1.144 U1.144@1592.56,1495 ; v1(1492.56,1236) 1509.36,1219.2 U1.130 ; v1(1492.56,1355) 1510.16,1337.4 U1.136 ; U1.113 1705.7,884.3 v1(1715,875)
  Top Layer w10: U1.108 1507.06,715.5 v3(1507.56,715) ; C4.1 J9.2
  Top Layer w12: U6.1 141,484 v1(141,395) 156,395 C15.2@150,401 ; J1.5 468.5,203.5 480,215 v3(665,215)
  other v1: 399,395 1801,625 1197.56,795 937.56,1090 937.56,1185
  other v3: 2245.67,172.69 2491.18,1864.72
HOLD: J6.3 R25.1 U1.61 U2.7 | length 1867
  Top Layer w8: J6.3 175,1675 250,1675 335,1590 335,1110 405,1040 v1(595,1040) 632.56,1040 650.36,1022.2 U1.61
  Bottom Layer w8: J6.3 175,1675 260,1675 R25.1 ; v1(595,1040) 595,895 535,835 535,675 560,650 U2.7
L-OUT: C3.2 J4.3 J8.7 R22.2 | length 1197.9
  Top Layer w8: J8.7 1412.86,150 1512.86,150 1577.86,215 J4.3@1955,215 ; R22.2 1784,475 1860,475 1905,430 1905,245 1935,215 J4.3@1955,215 ; v1(1955,150) J4.3@1955,215
LEFT: R22.1 U1.98 | length 452.5
  Top Layer w8: U1.98 1285.56,639.44 1345,580 1545,580 1575,550 R22.1
NetC1_1: C1.1 U4.3 Y2.1 | length 389.7
  Bottom Layer w8: U4.3 2033,525 2065,557 2065,646.21 2118.79,700 C1.1 Y2.1
NetC2_2: C2.2 C5.2 D1.2 R28.1 | length 273.6
  Bottom Layer w8: R28.1 2269,1734 D1.2 C5.2
NetC5_1: C5.1 R11.2 | length 81
  Bottom Layer w8: R11.2 C5.1
NetC6_2: C6.2 U4.8 | length 150
  Bottom Layer w8: v1(1850,275) U4.8@2000,275
NetC7_2: C7.2 U4.7 | length 156.2
  Bottom Layer w8: v1(1850,340) 1865,325 U4.7 U4.7@2000,325
NetC8_2: C8.2 U4.6 | length 162.4
  Bottom Layer w8: v1(1850,405) 1880,375 U4.6 U4.6@2000,375
NetC13_1: C13.1 U4.10 | length 297.6
  Bottom Layer w8: C13.1 1695,245 1695,305 1675,325 U4.10
NetC13_2: C13.2 R4.1 | length 100
  Bottom Layer w8: C13.2 R4.1
NetC15_1: C15.1 L1.1 U6.2 U6.4 | length 403.1
  Top Layer w12: C15.1 U6.2 ; U6.4@250,734 331,734 435,630 L1.1
NetC19_1: C19.1 L2.1 U7.2 U7.4 | length 239
  Bottom Layer w12: C19.1 U7.2 ; U7.4 L2.1@909,444
NetD2_1: D2.1 R6.2 | length 69
  Top Layer w12: D2.1@666,131 R6.2@735,131
NetJ1_1: J1.1 L3.1 | length 98.9
  Top Layer w12: J1.1 L3.1@366.14,288.86
NetJ3_2: J3.2 R11.1 R29.1 | length 90.6
  Bottom Layer w8: R29.1@2109.43,1870 R11.1
  other v3: 2109.28,1869.85
NetJ7_2: J7.2 R8.1 | length 553.6
  Top Layer w8: R8.1 1885,1510 1910,1535 2000,1535 2025,1510 2025,1321.06 J7.2
NetJ7_3: J7.3 R9.1 | length 508.7
  Top Layer w8: R9.1 1990,1585 2050,1525 2050,1374.8 J7.3
NetQ1_2: Q1.2 R28.2 | length 102.3
  Bottom Layer w8: Q1.2 2079,1702 R28.2
NetR10_1: R10.1 U1.71 | length 216.3
  Top Layer w8: U1.71 650.2,825.2 640,815 640,785 710,715 v3(730,715)
NetR23_1: R23.1 U1.39 | length 95.5
  Top Layer w8: U1.39 778.16,1455.6 v1(792.56,1470)
NetR24_1: R24.1 U1.37 | length 21.9
  Top Layer w12: U1.37@700,1498.06 v1@700,1520
  other v1: 700,1515
PS2_CLK: R9.2 U1.143 | length 244
  Top Layer w8: U1.143@1572.56,1475.77 U1.143 1630.3,1475.3 1695,1540 1695,1565 1715,1585 R9.2
PS2_DATA: R8.2 U1.142 | length 206
  Top Layer w8: U1.142 1655.6,1455.6 1710,1510 R8.2
R: C8.1 J8.10 R3.1 R14.2 R17.2 R20.2 | length 830.5
  Top Layer w8: R20.2 R17.2 R14.2 1375,347.59 v1(1412.86,309.73) 1508.13,405 1780,405 C8.1@1795,390
  Bottom Layer w8: R3.1 1462.86,260 J8.10
R0: R20.1 U1.94 | length 223.1
  Top Layer w8: U1.94 1206.76,618.24 1225,600 R20.1
R1: R17.1 U1.95 | length 246
  Top Layer w8: U1.95 1226.46,628.54 1300,555 R17.1
R2: R14.1 U1.97 | length 272.4
  Top Layer w8: U1.97 1265.86,624.14 1330,560 1350,560 1375,535 R14.1
R-OUT: C4.2 J4.2 J8.9 R21.2 | length 1790.1
  Top Layer w8: J8.9 1790,100 1810,120 2000,120 2040,160 2040,337.1 J4.2 ; R21.2 1759,675 2065,675 2115,625 2163.44,625 J4.2 ; C4.2 2254.44,534 J4.2
RIGHT: R21.1 U1.99 | length 416.5
  Top Layer w8: U1.99 1305.26,649.74 1355,600 1545,600 1570,625 R21.1
SD_CS: J2.2 U1.78 | length 1196.3
  Top Layer w8: v1(125,1185) 155,1185 225,1115 225,1015 620,620 850,620 891.56,661.56 U1.78
  Bottom Layer w8: J2.2 124.96,1185.04 v1(125,1185)
SD_MISO: J2.7 R34.1 U1.81 | length 1162.5
  Top Layer w8: v1(125,966) 199,966 590,575 895,575 950.66,630.66 U1.81
  Bottom Layer w8: J2.7 122.5,968.5 v1(125,966)
SD_MOSI: J2.3 U1.79 | length 1204.8
  Top Layer w8: v1(125,1140) 155,1140 210,1085 210,1005 610,605 865,605 911.26,651.26 U1.79
  Bottom Layer w8: J2.3 123.27,1141.73 v1(125,1140)
SD_SCK: J2.5 U1.80 | length 1171.8
  Top Layer w8: v1(125,1055) 155,1055 195,1015 195,995 600,590 880,590 930.96,640.96 U1.80
  Bottom Layer w8: J2.5 v1@124.88,1055.12
STDN: R30.1 R31.1 U4.1 | length 165
  Top Layer w8: R30.1 v1(1885,625)
  Bottom Layer w8: v1(1885,625) U4.1
TCK: J9.3 U1.109 | length 1056.5
  Top Layer w8: U1.109 1639.5,805.5 1660,785 1695,785 1730,750 2075,750 2100,725 2300,725 2325,700 v3(2425,700)
  Bottom Layer w8: v3(2425,700) 2425,575 J9.3@2450,550
TDI: J9.5 U1.110 | length 908.6
  Top Layer w8: U1.110 1654.8,825.2 1675,805 1710,805 1740,775 2075,775 2100,750 J9.5@2450,750
TDO: J9.4 U1.106 | length 1130.5
  Top Layer w8: U1.106 1443.16,656.84 1475,625 1535,625 1610,700 2075,700 2125,650 J9.4@2450,650
TMS: J9.6 U1.107 | length 1261.1
  Top Layer w8: U1.107 1462.86,667.14 1480,650 1525,650 1600,725 2075,725 2115,685 v3(2225,685) ; v3(2225,850) 2453,850 J9.6@2455,848
  Bottom Layer w8: v3(2225,685) v3(2225,850)
VIDEO: J4.1 R4.2 | length 397.1
  Top Layer w8: v1(1850,66) 2242.13,66 J4.1
VSYNC: J8.2 U1.92 | length 558.8
  Top Layer w8: v3(1135,625) 1167.36,657.36 U1.92
  Bottom Layer w8: J8.2 1062.86,400.86 1135,473 v3(1135,625)
WP: J6.6 R26.1 U1.62 U2.3 | length 1527.9
  Top Layer w8: J6.6 260,1625 315,1570 315,1092.48 398.7,1008.78 v1(530,1008.78) 638.78,1008.78 645.06,1002.5 U1.62
  Bottom Layer w8: J6.6 R26.1@300,1625 ; U2.3 425,700 475,750 475,863 500,888 500,978.78 v1(530,1008.78)
WR: U1.134 U3.29 | length 308
  Top Layer w8: U1.134 1670.56,1298 1697.56,1325 v2(1725,1325)
  Bottom Layer w8: U3.29 1678.79,1350 1703.79,1325 v2(1725,1325)
XA0: U1.115 U3.12 | length 413.3
  Top Layer w8: U1.115 1783.7,923.7 1810,950 v2(1975,950)
XA1: U1.116 U3.11 | length 425.9
  Top Layer w8: U1.116 1700.96,943.4 1707.56,950 1775,950 1825,1000 v2(1975,1000)
XA2: U1.117 U3.10 | length 438.4
  Top Layer w8: U1.117 1693.1,963.1 1730,1000 1775,1000 1825,1050 v2(1975,1050)
XA3: U1.119 U3.9 | length 442.8
  Top Layer w8: U1.119 1675.06,1002.5 1722.56,1050 1775,1050 1825,1100 v2(1975,1100)
XA4: U1.120 U3.8 | length 455.4
  Top Layer w8: U1.120 1664.76,1022.2 1742.56,1100 1775,1100 1825,1150 v2(1975,1150)
XA5: U1.123 U3.7 | length 451.6
  Top Layer w8: U1.123 1673.86,1081.3 1742.56,1150 1775,1150 1825,1200 v2(1975,1200)
XA6: U1.126 U3.6 | length 447.8
  Top Layer w8: U1.126 1672.96,1140.4 1732.56,1200 1775,1200 1825,1250 v2(1975,1250)
XA7: U1.131 U3.5 | length 427.7
  Top Layer w8: U1.131 1701.46,1238.9 1712.56,1250 1750,1250 1800,1300 v2(1975,1300)
XA8: U1.127 U3.27 | length 353.7
  Top Layer w8: U1.127 1665.1,1160.1 1730,1225 v2(1740,1225)
  Bottom Layer w8: U3.27 1675,1250 1700,1225 v2(1740,1225)
XA9: U1.124 U3.26 | length 377.4
  Top Layer w8: U1.124 1666,1101 1740,1175 v2(1750,1175)
  Bottom Layer w8: U3.26 1676,1200 1701,1175 v2(1750,1175)
XA10: U1.118 U3.23 | length 344.3
  Top Layer w8: U1.118 1682.8,982.8 1725,1025 v2(1740,1025)
  Bottom Layer w8: U3.23 1678,1050 1703,1025 v2(1740,1025)
XA11: U1.121 U3.25 | length 401.2
  Top Layer w8: U1.121 1659.46,1041.9 1742.56,1125 v2(1760,1125)
  Bottom Layer w8: U3.25 1676,1150 1701,1125 v2(1760,1125)
XA12: U1.133 U3.4 | length 432.1
  Top Layer w8: U1.133 1680.86,1278.3 1702.56,1300 1750,1300 1800,1350 v2(1975,1350)
XA13: U1.132 U3.28 | length 303.6
  Top Layer w8: U1.132 1691.16,1258.6 1707.56,1275 v2(1725,1275)
  Bottom Layer w8: U3.28 1678.79,1300 1703.79,1275 v2(1725,1275)
XA14: U1.137 U3.3 | length 426.1
  Top Layer w8: U1.137 1685.46,1357.1 1692.56,1350 1750,1350 1800,1400 v2(1975,1400)
XA15: U1.140 U3.31 | length 300.4
  Top Layer w8: U1.140 1686.36,1416.2 1695.16,1425 v2(1725,1425)
  Bottom Layer w8: U3.31 1678.79,1450 1703.79,1425 v2(1725,1425)
XA16: U1.139 U3.2 | length 424.6
  Top Layer w8: U1.139 1694.06,1396.5 1697.56,1400 1750,1400 1775,1425 1900,1425 1925,1450 v2(1975,1450)
XA17: U1.141 U3.1 | length 429
  Top Layer w8: U1.141 1681.66,1435.9 1700.76,1455 1890,1455 1935,1500 v2(1975,1500)
XA18: U1.138 U3.30 | length 297.5
  Top Layer w8: U1.138 1695.76,1376.8 1697.56,1375 v2(1725,1375)
  Bottom Layer w8: U3.30 1678.79,1400 1703.79,1375 v2(1725,1375)
XD0: U1.114 U3.13 | length 404.1
  Top Layer w8: U1.114 1776,904 1780,900 v2(1975,900)
XD1: U1.112 U3.14 | length 412.6
  Top Layer w8: U1.112 1682.96,864.6 1702.56,845 1745,845 1750,850 v2(1975,850)
XD2: U1.111 U3.15 | length 421
  Top Layer w8: U1.111 1672.66,844.9 1692.56,825 1730,825 1755,800 v2(1975,800)
XD3: U1.105 U3.17 | length 237.7
  Top Layer w8: U1.105 1423.46,758.46 1450,785 1480,785 v4(1480,782)
  Bottom Layer w8: v4(1480,782) 1500,782 1532,750 U3.17
XD4: U1.104 U3.18 | length 285.9
  Top Layer w8: U1.104 1403.76,773.76 1415,785 1415,800 1440,825 v2(1460,825)
  Bottom Layer w8: v2(1460,825) 1500,825 1525,800 U3.18
XD5: U1.102 U3.19 | length 373.4
  Top Layer w8: U1.102 1364.36,770.64 1350,785 1350,815 1400,865 v2(1495,865)
  Bottom Layer w8: v2(1495,865) 1510,865 1525,850 U3.19
XD6: U1.101 U3.20 | length 415.5
  Top Layer w8: U1.101 1344.66,765.34 1330,780 1330,825 1414.5,909.5 v2(1474.5,909.5)
  Bottom Layer w8: v2(1474.5,909.5) 1499.5,909.5 1509,900 U3.20
XD7: U1.100 U3.21 | length 454.3
  Top Layer w8: U1.100 1324.96,760.04 1310,775 1310,835 1425,950 v2(1500,950)
  Bottom Layer w8: v2(1500,950) U3.21
pads on no net: J1.2 J1.3 J1.4 J1.11 J1.M J2.1 J2.8 J2.9 J2.10 J2.P1 J2.P2 J2.P3 J2.P4 J3.3 J3.4 J3.5 J4.M J7.5 J7.6 J8.5 M1. M2. M3. M4. U1.72 U4.9 U4.11 U5.1

## Polygon pours and split planes (outlines as drawn)
GND on Bottom Layer "543" (hatched Horizontal grid 8 track 8, remove dead copper, pour order 0): 2552.91,7.28 5.31,7.28 5.31,2196.65 2552.91,2196.65

## Keep-outs
Keep-Out Layer:
  lines w10: 2435,2204.53 125,2204.53 ccw(c124.77,2079.77) 0,2080 0,125 ccw(c125,125) 125,0 2435,0 ccw(c2434.53,124.53) 2559.06,125 2559.06,2080 ccw(c2434.53,2080.47) 2435,2205

## Silkscreen, mask and mechanical layers (free items; w line width, h text height)
Top Overlay:
  drawing of 11 lines, arcs and shapes, not listed
  text "superfo" at 455,1716.7 h18.75
  text "antoniovillena" at 455,1683.5 h18.75
  text "mcleod_ideafix" at 455,1648.5 h18.75
  text "Hark0" at 455,1613.5 h18.75

## Text inside footprints (layer, text, board x,y; h text height)
U1: Top Overlay "109" at 1670.99,821.13 h37.5 r90; Top Overlay "37" at 592.56,1495 h37.5 r270; Top Overlay "1" at 1501.74,1693.42 h37.5 r180; Top Overlay "73" at 705,635 h37.5; Mechanical 2 "QUAD.50M/144/WG22.60" at 878.74,937.38 h22.5 r180